# Altium PCB AudioDSP-2.0.PcbDoc (part 2 of 2)
Units mil, origin at the board's own origin, x right, y up, seen from the top; angles counter-clockwise.
Board outline 3935 x 3935 mil, 4 copper layers (Top Layer, MLT, MLB, Bottom Layer), stack 59.617 mil thick; 223 components, 140 nets, 777 pads, 366 vias.
Unrouted connection lines stored in the file: 450.
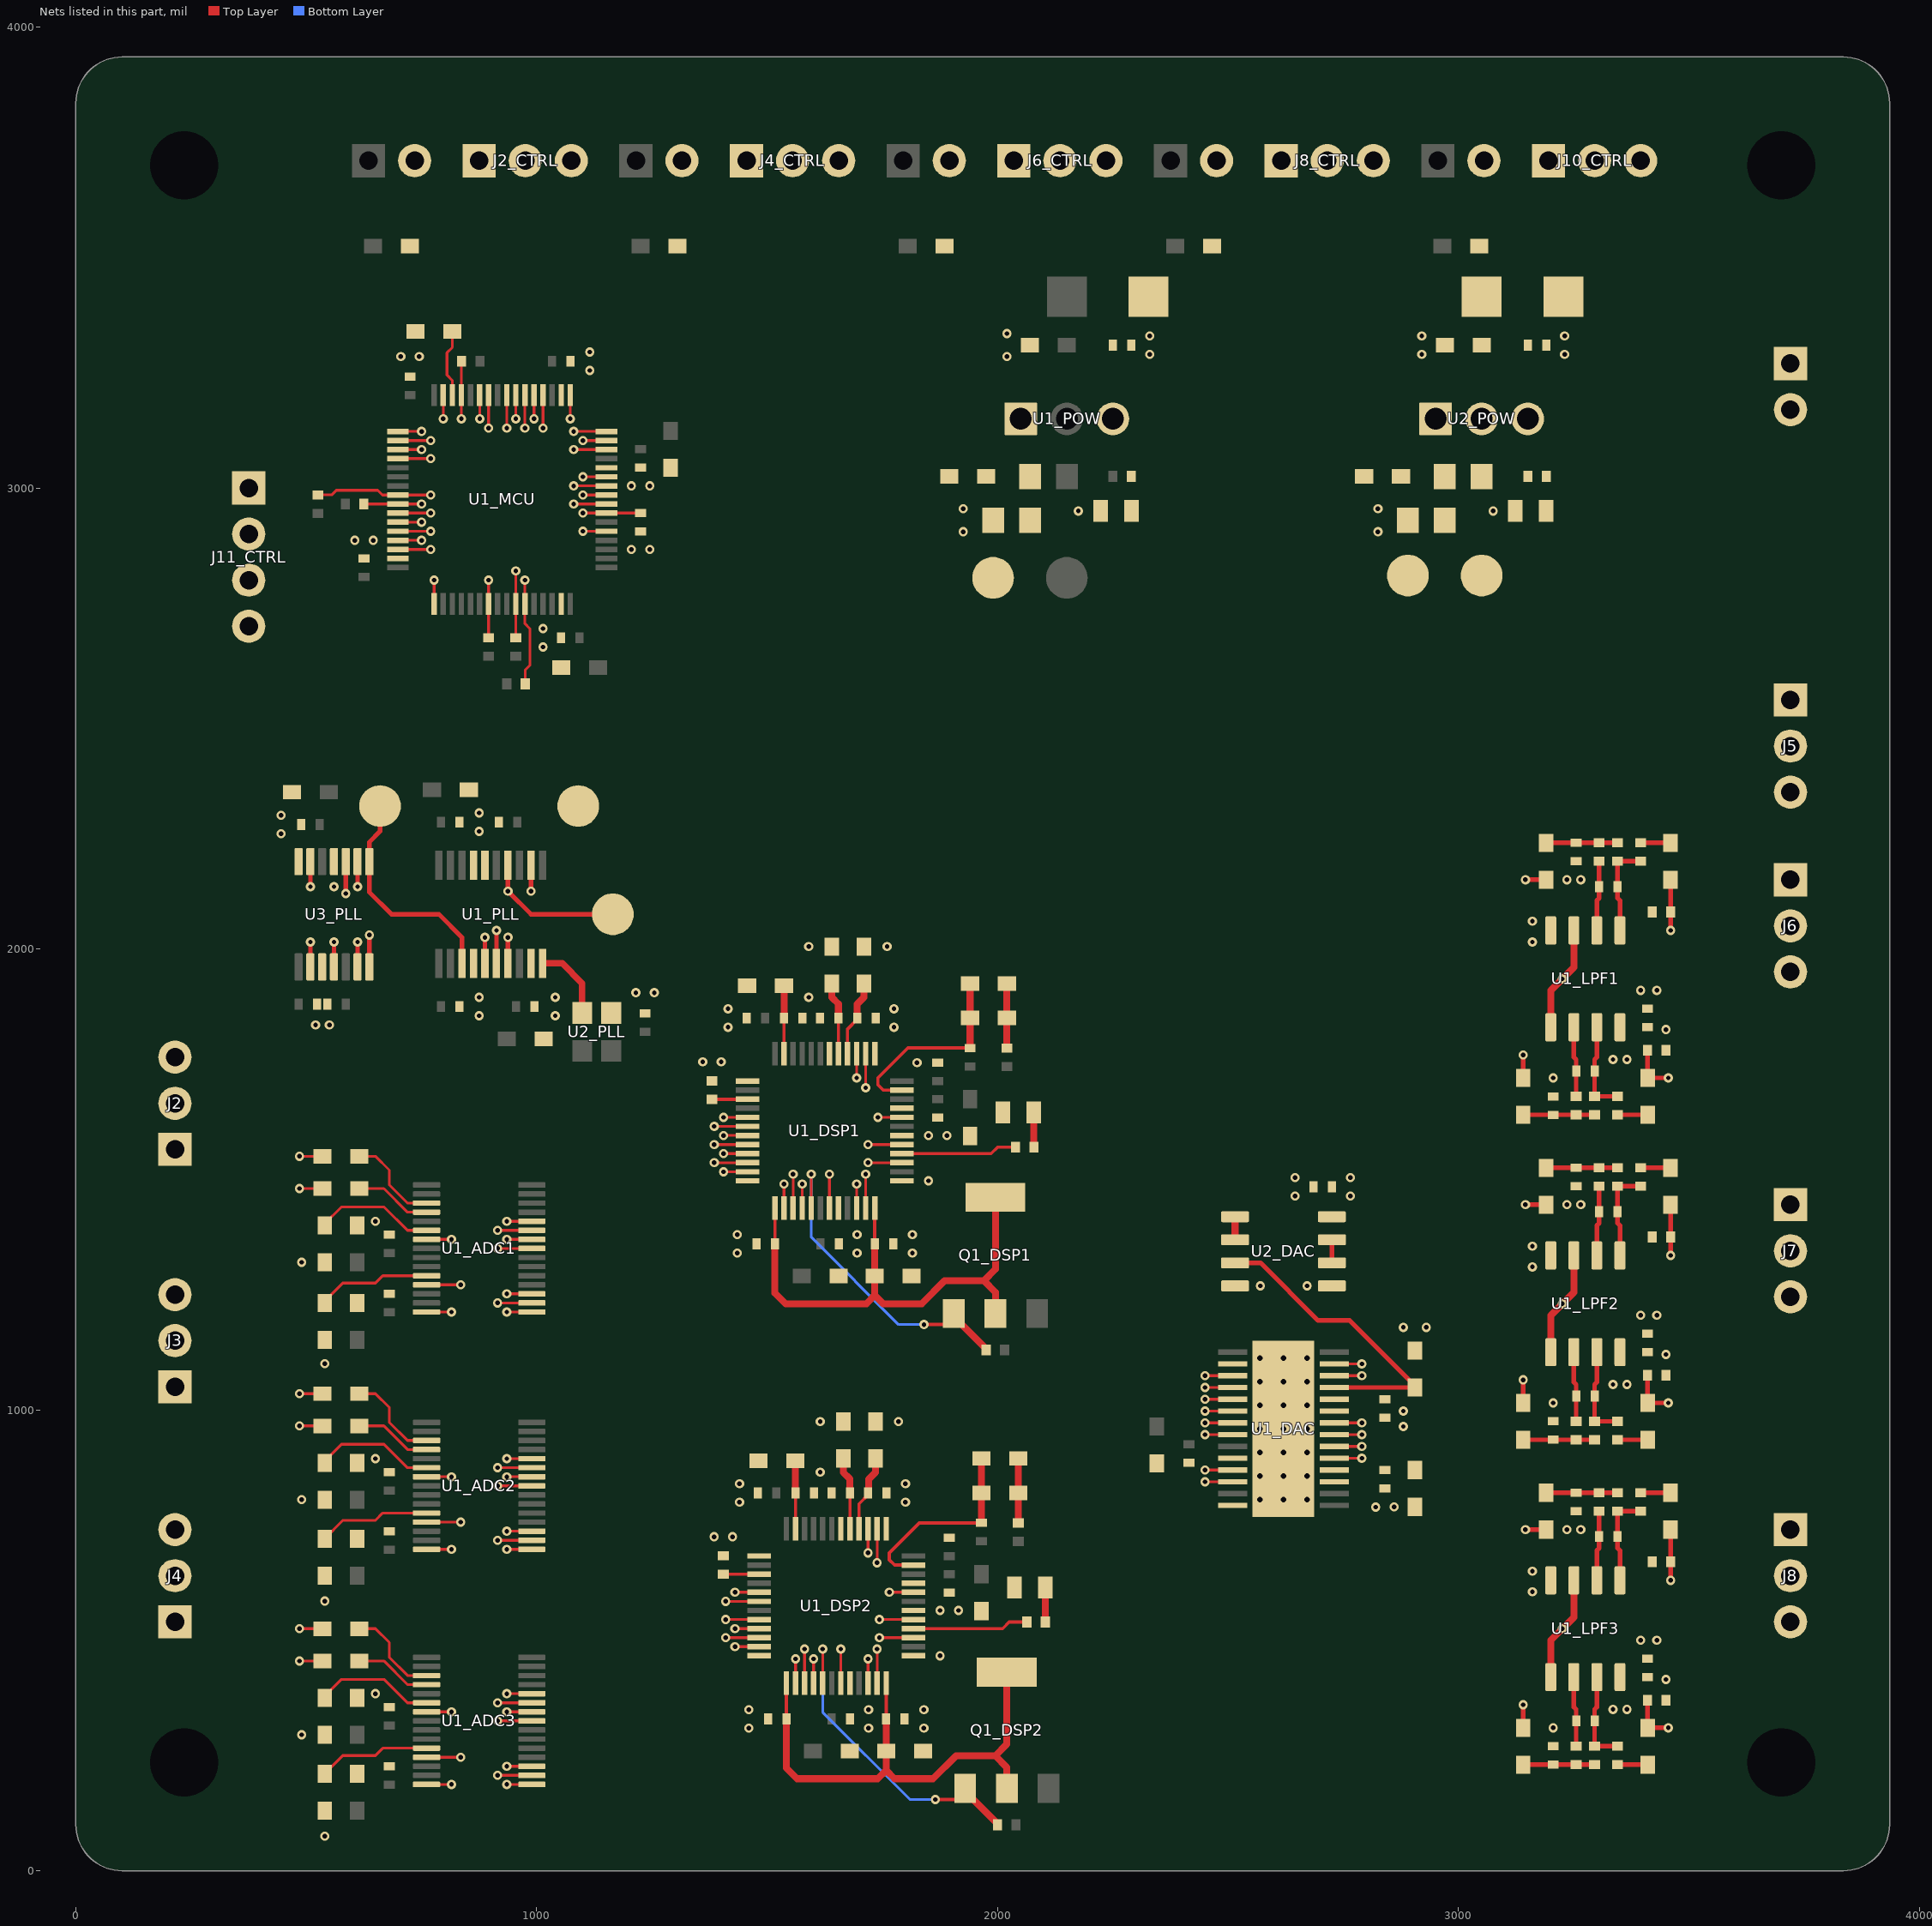
[diagram p2: the nets of this part, all layers, seen from the top]

## Via types
v1: diameter 20, hole 10, Top Layer to Bottom Layer, tented both sides, 345 vias
v2: diameter 23.62, hole 11.81, Top Layer to Bottom Layer, tented both sides, 21 vias

## Nets (pads, with @x,y where several pads share a name; then routed paths per layer and width w, separated by ;. In a path a pad name is that pad's centre, name@x,y a point inside that pad or via, vN(x,y) a via of type N, cw(c..) or ccw(c..) an arc to the next point about the centre after c; other vN are vias at no path point) (continued)
+5V0: C1_POW.2 C3_DAC.2 C4_DAC.2 C4_POW.2 C5_DAC.2 C7_DAC.1 C9_LPF1.1 C9_LPF2.1 C9_LPF3.1 D1_POW.2 D2_POW.1 R3_POW.2 R6_POW.1 TP1_POW.1 U1_DAC.17 U1_DAC.23 U1_LPF1.8 U1_LPF2.8 U1_LPF3.8 U1_POW.3 U2_DAC.8 U2_POW.2
  other v1: 3335,350 3365,350 2820,788.82 2860,789.25 2880,963.82 2880,997.2 3335,1055 3365,1055 2765,1463.82 2765,1503.82 3335,1760 3365,1760
+DC_IN: C3_POW.2 D2_POW.2 J1.1 U2_POW.3
ADC0: J2_CTRL.3 U1_MCU.14 | length 71.4
  Top Layer w6: v1(1080,3083.27) U1_MCU.14@1151.38,3083.27
ADC1: J2_CTRL.2 U1_MCU.15 | length 51.4
  Top Layer w6: v1(1100,3102.95) U1_MCU.15@1151.38,3102.95
ADC2: J2_CTRL.1 U1_MCU.16 | length 71.4
  Top Layer w6: v1(1080,3122.64) U1_MCU.16@1151.38,3122.64
ADC3: J4_CTRL.3 U1_MCU.17 | length 51.4
  Top Layer w6: v1(1072.64,3150) U1_MCU.17@1072.64,3201.38
ADC4: J4_CTRL.2 U1_MCU.20 | length 71.4
  Top Layer w6: v1(1013.58,3130) U1_MCU.20@1013.58,3201.38
ADC5: J4_CTRL.1 U1_MCU.21 | length 51.4
  Top Layer w6: v1(993.9,3150) U1_MCU.21@993.9,3201.38
ADC6: J6_CTRL.3 U1_MCU.22 | length 71.4
  Top Layer w6: v1(974.21,3130) U1_MCU.22@974.21,3201.38
ADC7: J6_CTRL.2 U1_MCU.23 | length 51.4
  Top Layer w6: v1(954.53,3150) U1_MCU.23@954.53,3201.38
ADC8: J6_CTRL.1 U1_MCU.26 | length 71.4
  Top Layer w6: v1(895.47,3130) U1_MCU.26@895.47,3201.38
ADC9: J8_CTRL.3 U1_MCU.27 | length 51.6
  Top Layer w6: U1_MCU.27@875.79,3201.38 876.1,3201.06 876.1,3150.31 v1(876.42,3150)
ADC10: J8_CTRL.2 U1_MCU.8 | length 71.4
  Top Layer w6: v1(1080,2965.16) U1_MCU.8@1151.38,2965.16
ADC11: J8_CTRL.1 U1_MCU.9 | length 51.4
  Top Layer w6: v1(1100,2984.84) U1_MCU.9@1151.38,2984.84
ADC12: J10_CTRL.3 U1_MCU.10 | length 71.4
  Top Layer w6: v1(1080,3004.53) U1_MCU.10@1151.38,3004.53
ADC13: J10_CTRL.2 U1_MCU.11 | length 51.4
  Top Layer w6: v1(1100,3024.21) U1_MCU.11@1151.38,3024.21
ADC14: J10_CTRL.1 U1_MCU.24 | length 71.4
  Top Layer w6: v1(934.84,3130) U1_MCU.24@934.84,3201.38
CSEL: U1_MCU.45 U1_PLL.12 | length 107.9
  Top Layer w6: U1_MCU.45@698.62,2886.42 v1(750,2886.42)
  Top Layer w10: v1(987.48,2125) U1_PLL.12@987.48,2181.5
EN_SCK: U1_MCU.36 U3_PLL.2 | length 125.6
  Top Layer w6: U1_MCU.36@698.62,3063.58 v1(770,3063.58)
  Top Layer w10: v1(611.18,2135) U3_PLL.2@611.18,2189.17
FS1: U1_MCU.42 U1_PLL.5 | length 127.9
  Top Layer w6: U1_MCU.42@698.62,2945.47 v1(770,2945.47)
  Top Layer w10: U1_PLL.5@887.5,1968.5 v1(887.5,2025)
FS2: U1_MCU.43 U1_PLL.6 | length 122.9
  Top Layer w6: U1_MCU.43@698.62,2925.79 v1(750,2925.79)
  Top Layer w10: U1_PLL.6@912.5,1968.5 v1(912.5,2040)
GND: C1_ADC1.1 C1_ADC2.1 C1_ADC3.1 C1_CTRL.1 C1_DAC.1 C1_DSP1.2 C1_DSP2.2 C1_MCU.1 C1_PLL.1 C1_POW.1 C2_ADC1.1 C2_ADC2.1 C2_ADC3.1 C2_CTRL.1 C2_DAC.1 C2_DSP1.2 C2_DSP2.2 C2_LPF1.1 C2_LPF2.1 C2_LPF3.1 C2_MCU.1 C2_PLL.1 C2_POW.1 C3_ADC1.1 C3_ADC2.1 C3_ADC3.1 C3_CTRL.1 C3_DAC.1 C3_DSP1.2 C3_DSP2.2 C3_MCU.1 C3_PLL.1 C3_POW.1 C4_CTRL.1 C4_DAC.1 C4_DSP1.2 C4_DSP2.2 C4_MCU.1 C4_PLL.1 C4_POW.1 C5_ADC1.1 C5_ADC2.1 C5_ADC3.1 C5_CTRL.1 C5_DAC.1 C5_DSP1.2 C5_DSP2.2 C5_MCU.1 C5_PLL.1 C5_POW.1 C6_DAC.1 C6_DSP1.2 C6_DSP2.2 C6_LPF1.1 C6_LPF2.1 C6_LPF3.1 C6_MCU.1 C6_PLL.1 C6_POW.1 C7_ADC1.2 C7_ADC2.2 C7_ADC3.2 C7_DAC.2 C7_DSP1.1 C7_DSP2.1 C7_MCU.1 C7_PLL.1 C8_DSP1.1 C8_DSP2.1 C8_MCU.1 C8_PLL.1 C9_DSP1.1 C9_DSP2.1 C9_LPF1.2 C9_LPF2.2 C9_LPF3.2 C9_MCU.1 C9_PLL.1 C10_ADC1.1 C10_ADC2.1 C10_ADC3.1 C10_DSP1.2 C10_DSP2.2 C10_PLL.1 C11_DSP1.2 C11_DSP2.2 C11_PLL.1 C12_DSP1.1 C12_DSP2.1 C13_DSP1.1 C13_DSP2.1 C14_DSP1.1 C14_DSP2.1 C15_DSP1.1 C15_DSP2.1 D1_DSP1.2 D1_DSP2.2 D3_POW.2 D4_POW.2 J1.2 J1_CTRL.2 J2.3 J3.3 J3_CTRL.2 J4.3 J5.3 J5_CTRL.2 J6.3 J7.3 J7_CTRL.2 J8.3 J9_CTRL.2 J11_CTRL.3 R2_POW.1 R4_DSP1.1 R4_DSP2.1 R4_POW.1 R5_LPF1.1 R5_LPF2.1 R5_LPF3.1 R10_LPF1.1 R10_LPF2.1 R10_LPF3.1 TP3_PLL.1 TP3_POW.1 TP4_POW.1 U1_ADC1.7 U1_ADC1.12 U1_ADC1.25 U1_ADC1.26 U1_ADC2.7 U1_ADC2.12 U1_ADC2.25 U1_ADC2.26 U1_ADC3.7 U1_ADC3.12 U1_ADC3.25 U1_ADC3.26 U1_DAC.2 U1_DAC.10 U1_DAC.14 U1_DAC.18 U1_DAC.24 U1_DAC.29 U1_DSP1.1 U1_DSP1.6 U1_DSP1.7 U1_DSP1.12 U1_DSP1.20 U1_DSP1.25 U1_DSP1.30 U1_DSP1.33 U1_DSP1.37 U1_DSP1.42 U1_DSP2.1 U1_DSP2.6 U1_DSP2.12 U1_DSP2.20 U1_DSP2.25 U1_DSP2.30 U1_DSP2.33 U1_DSP2.37 U1_DSP2.42 U1_LPF1.4 U1_LPF2.4 U1_LPF3.4 U1_MCU.12 U1_MCU.18 U1_MCU.31 U1_MCU.47 U1_MCU.63 U1_PLL.4 U1_PLL.9 U1_PLL.16 U1_PLL.17 U2_DAC.4 U2_DAC.5 U2_PLL.2 U3_PLL.4 U3_PLL.7 U3_PLL.10 | length 1019.3
  Top Layer w6: U1_ADC3.12@760.83,246.26 v1(835,246.26) ; U1_ADC3.7@760.83,344.69 v1(815,344.69) ; U1_ADC2.12@760.83,756.26 v1(835,756.26) ; U1_ADC2.7@760.83,854.69 v1(815,854.69) ; U1_ADC1.12@760.83,1271.26 v1(835,1271.26) ; U1_ADC1.7@760.83,1369.69 v1(815,1369.69) ; v1(797.05,3150) U1_MCU.31@797.05,3201.38 ; v1(915,364.37) U1_ADC3.25@989.17,364.37 ; v1(915,874.37) U1_ADC2.25@989.17,874.37 ; v1(915,1389.37) U1_ADC1.25@989.17,1389.37 ; v1(935,384.06) U1_ADC3.26@989.17,384.06 ; v1(935,894.06) U1_ADC2.26@989.17,894.06 ; v1(935,1409.06) U1_ADC1.26@989.17,1409.06 ; v1(1385,1614.84) U1_DSP1.6@1457.68,1614.84 ; v1(1405,1595.16) U1_DSP1.7@1457.68,1595.16 ; v1(1410,584.37) U1_DSP2.6@1482.52,584.37
  other v1: 540,75 490,295 1459.84,309.53 1719.84,309.53 1839.84,309.53 3205,310 1459.84,349.53 1719.84,349.53 1839.84,349.53 650,384.06 3450,415 1874.84,466.26 3395,500 3430,500 1874.84,564.69 1914.84,564.69 540,585 3160,605 3160,650 1384.84,724.53 1424.84,724.53 3235,740 3265,740 1439.84,799.53 1799.84,799.53 490,805 1439.84,839.53 1799.84,839.53 1614.84,864.53 650,894.06 1614.84,974.53 1784.84,974.53 3205,1015 540,1100 3450,1120 2880,1178.82 2930,1178.82 3395,1205 3430,1205 2570,1268.82 2671.18,1268.82 3160,1310 490,1320 1435,1340 1695,1340 1815,1340 3160,1355 1435,1380 1695,1380 1815,1380 650,1409.06 3235,1445 3265,1445 2645,1463.82 1850,1496.73 2645,1503.82 1850,1595.16 1890,1595.16 3205,1720 1825,1753.27 1360,1755 1400,1755 3450,1825 1415,1830 1775,1830 520,1835 550,1835 875,1855 1040,1855 1415,1870 1775,1870 875,1895 1040,1895 1590,1895 1215,1905 1255,1905 3395,1910 3430,1910 1590,2005 1760,2005 3160,2015 3160,2060 560,2135 3235,2150 3265,2150 445,2250 875,2255 445,2290 875,2295 1013.58,2655 1013.58,2695 1205,2866.73 1245,2866.73 605,2886.42 645,2886.42 1925,2905 2825,2905 2175,2950 3075,2950 1925,2955 2825,2955 1205,3004.53 1245,3004.53 1115,3255 705,3285 745,3285 2020,3285 2330,3290 2920,3290 3230,3290 1115,3295 2330,3330 2920,3330 3230,3330 2020,3335
  other v2: 2568.82,805.28 2620,805.28 2671.18,805.28 2568.82,856.46 2620,856.46 2671.18,856.46 2568.82,907.64 2620,907.64 2671.18,907.64 2568.82,958.82 2620,958.82 2671.18,958.82 2568.82,1010 2620,1010 2671.18,1010 2568.82,1061.18 2620,1061.18 2671.18,1061.18 2568.82,1112.36 2620,1112.36 2671.18,1112.36
I2C1.SCL: R1_MCU.1 U1_ADC1.24 U1_DSP1.23 U1_DSP2.23 U1_MCU.58 | length 346.7
  Top Layer w6: v1(935,1369.68) U1_ADC1.24@989.17,1369.68 ; R1_MCU.1@954.53,2675 U1_MCU.58@954.53,2748.62 v1(954.53,2820) ; U1_DSP1.23@1713.58,1437.68 v1(1713.58,1511.42) ; U1_DSP2.23@1738.43,407.2 v1(1738.43,480.94)
I2C1.SDA: R2_MCU.1 U1_ADC1.23 U1_DSP1.22 U1_DSP2.22 U1_MCU.59 | length 412.4
  Top Layer w6: v1(915,1350) U1_ADC1.23@989.17,1350 ; v1(974.21,2800) U1_MCU.59@974.21,2748.62 974.21,2705.79 985,2695 985,2615 975,2605 R2_MCU.1@975,2575 ; U1_DSP1.22@1693.9,1437.68 v1(1693.9,1490) ; U1_DSP2.22@1718.74,407.2 v1(1718.74,459.53)
I2C2.SCL: R3_MCU.1 U1_ADC2.24 U1_MCU.29 | length 179.2
  Top Layer w6: v1(836.42,3150) U1_MCU.29@836.42,3201.38 R3_MCU.1@836.42,3275 ; v1(935,854.68) U1_ADC2.24@989.17,854.68
I2C2.SDA: R4_MCU.1 U1_ADC2.23 U1_MCU.55 | length 199.2
  Top Layer w6: R4_MCU.1@895.47,2675 U1_MCU.55@895.47,2748.62 v1(895.47,2800) ; v1(915,835) U1_ADC2.23@989.17,835
I2C3.SCL: R5_MCU.1 U1_ADC3.24 U1_DAC.3 U1_MCU.41 | length 238.9
  Top Layer w6: R5_MCU.1@625,2965.16 U1_MCU.41@698.62,2965.16 v1(750,2965.16) ; v1(935,344.68) U1_ADC3.24@989.17,344.68 ; v1(2450,1073.98) U1_DAC.3@2509.76,1073.98
I2C3.SDA: R6_MCU.1 U1_ADC3.23 U1_DAC.4 U1_MCU.40 | length 387.3
  Top Layer w6: R6_MCU.1@525,2985 555,2985 565,2995 655,2995 665.16,2984.84 U1_MCU.40@698.62,2984.84 v1(770,2984.84) ; v1(915,325) U1_ADC3.23@989.17,325 ; v1(2450,1048.39) U1_DAC.4@2509.76,1048.39
LED_ON_DSP1: R3_DSP1.1 U1_DSP1.28 | length 252
  Top Layer w7: U1_DSP1.28@1792.32,1555.79 1985.79,1555.79 2000,1570 R3_DSP1.1@2038.46,1570
LED_ON_DSP2: R3_DSP2.1 U1_DSP2.28 | length 252
  Top Layer w7: U1_DSP2.28@1817.17,525.32 2010.63,525.32 2024.84,539.53 R3_DSP2.1@2063.31,539.53
MCK: TP1_PLL.1 U1_MCU.5 U1_PLL.14 | length 356.1
  Top Layer w6: v1(1100,2906.1) U1_MCU.5@1151.38,2906.1
  Top Layer w10: U1_PLL.14@937.5,2181.5 v1(937.5,2125) 987.5,2075 TP1_PLL.1@1165,2075
NetC1_LPF1_1: C1_LPF1.1 R3_LPF1.1 U1_LPF1.2 | length 152.1
  Top Layer w10: U1_LPF1.2@3300,2040 3300,2105 3305,2110 C1_LPF1.1@3305,2135 R3_LPF1.1@3305,2190
NetC1_LPF1_2: C1_LPF1.2 R2_LPF1.2 R4_LPF1.2 U1_LPF1.1 | length 202.1
  Top Layer w10: U1_LPF1.1@3350,2040 3350,2105 3345,2110 C1_LPF1.2@3345,2135 R2_LPF1.2@3345,2190 R4_LPF1.2@3395,2190
NetC1_LPF2_1: C1_LPF2.1 R3_LPF2.1 U1_LPF2.2 | length 152.1
  Top Layer w10: U1_LPF2.2@3300,1335 3300,1400 3305,1405 C1_LPF2.1@3305,1430 R3_LPF2.1@3305,1485
NetC1_LPF2_2: C1_LPF2.2 R2_LPF2.2 R4_LPF2.2 U1_LPF2.1 | length 202.1
  Top Layer w10: U1_LPF2.1@3350,1335 3350,1400 3345,1405 C1_LPF2.2@3345,1430 R2_LPF2.2@3345,1485 R4_LPF2.2@3395,1485
NetC1_LPF3_1: C1_LPF3.1 R3_LPF3.1 U1_LPF3.2 | length 152.1
  Top Layer w10: U1_LPF3.2@3300,630 3300,695 3305,700 C1_LPF3.1@3305,725 R3_LPF3.1@3305,780
NetC1_LPF3_2: C1_LPF3.2 R2_LPF3.2 R4_LPF3.2 U1_LPF3.1 | length 202.1
  Top Layer w10: U1_LPF3.1@3350,630 3350,695 3345,700 C1_LPF3.2@3345,725 R2_LPF3.2@3345,780 R4_LPF3.2@3395,780
NetC2_LPF1_2: C2_LPF1.2 R1_LPF1.1 R2_LPF1.1 R3_LPF1.2 | length 155
  Top Layer w10: R1_LPF1.1@3190,2230 C2_LPF1.2@3255,2230 R3_LPF1.2@3305,2230 R2_LPF1.1@3345,2230
NetC2_LPF2_2: C2_LPF2.2 R1_LPF2.1 R2_LPF2.1 R3_LPF2.2 | length 155
  Top Layer w10: R1_LPF2.1@3190,1525 C2_LPF2.2@3255,1525 R3_LPF2.2@3305,1525 R2_LPF2.1@3345,1525
NetC2_LPF3_2: C2_LPF3.2 R1_LPF3.1 R2_LPF3.1 R3_LPF3.2 | length 155
  Top Layer w10: R1_LPF3.1@3190,820 C2_LPF3.2@3255,820 R3_LPF3.2@3305,820 R2_LPF3.1@3345,820
NetC4_LPF1_2: C4_LPF1.2 R4_LPF1.1 | length 65
  Top Layer w10: R4_LPF1.1@3395,2230 C4_LPF1.2@3460,2230
NetC4_LPF2_2: C4_LPF2.2 R4_LPF2.1 | length 65
  Top Layer w10: R4_LPF2.1@3395,1525 C4_LPF2.2@3460,1525
NetC4_LPF3_2: C4_LPF3.2 R4_LPF3.1 | length 65
  Top Layer w10: R4_LPF3.1@3395,820 C4_LPF3.2@3460,820
NetC5_LPF1_1: C5_LPF1.1 R8_LPF1.1 U1_LPF1.6 | length 152.1
  Top Layer w10: U1_LPF1.6@3250,1830 3250,1765 3255,1760 C5_LPF1.1@3255,1735 R8_LPF1.1@3255,1680
NetC5_LPF1_2: C5_LPF1.2 R7_LPF1.2 R9_LPF1.2 U1_LPF1.7 | length 202.1
  Top Layer w10: U1_LPF1.7@3300,1830 3300,1765 3295,1760 C5_LPF1.2@3295,1735 R7_LPF1.2@3295,1680 R9_LPF1.2@3345,1680
NetC5_LPF2_1: C5_LPF2.1 R8_LPF2.1 U1_LPF2.6 | length 152.1
  Top Layer w10: U1_LPF2.6@3250,1125 3250,1060 3255,1055 C5_LPF2.1@3255,1030 R8_LPF2.1@3255,975
NetC5_LPF2_2: C5_LPF2.2 R7_LPF2.2 R9_LPF2.2 U1_LPF2.7 | length 202.1
  Top Layer w10: U1_LPF2.7@3300,1125 3300,1060 3295,1055 C5_LPF2.2@3295,1030 R7_LPF2.2@3295,975 R9_LPF2.2@3345,975
NetC5_LPF3_1: C5_LPF3.1 R8_LPF3.1 U1_LPF3.6 | length 152.1
  Top Layer w10: U1_LPF3.6@3250,420 3250,355 3255,350 C5_LPF3.1@3255,325 R8_LPF3.1@3255,270
NetC5_LPF3_2: C5_LPF3.2 R7_LPF3.2 R9_LPF3.2 U1_LPF3.7 | length 202.1
  Top Layer w10: U1_LPF3.7@3300,420 3300,355 3295,350 C5_LPF3.2@3295,325 R7_LPF3.2@3295,270 R9_LPF3.2@3345,270
NetC5_POW_2: C5_POW.2 R3_POW.1 R4_POW.2 U2_POW.1
NetC6_LPF1_2: C6_LPF1.2 R6_LPF1.1 R7_LPF1.1 R8_LPF1.2 | length 155
  Top Layer w10: R6_LPF1.1@3140,1640 C6_LPF1.2@3205,1640 R8_LPF1.2@3255,1640 R7_LPF1.1@3295,1640
NetC6_LPF2_2: C6_LPF2.2 R6_LPF2.1 R7_LPF2.1 R8_LPF2.2 | length 155
  Top Layer w10: R6_LPF2.1@3140,935 C6_LPF2.2@3205,935 R8_LPF2.2@3255,935 R7_LPF2.1@3295,935
NetC6_LPF3_2: C6_LPF3.2 R6_LPF3.1 R7_LPF3.1 R8_LPF3.2 | length 155
  Top Layer w10: R6_LPF3.1@3140,230 C6_LPF3.2@3205,230 R8_LPF3.2@3255,230 R7_LPF3.1@3295,230
NetC6_POW_2: C6_POW.2 R1_POW.1 R2_POW.2 U1_POW.1
NetC7_ADC1_1: C7_ADC1.1 U1_ADC1.11 | length 247.6
  Top Layer w6: C7_ADC1.1@540,1231.89 540,1235.83 579.17,1275 650,1275 665.94,1290.94 U1_ADC1.11@760.83,1290.94
NetC7_ADC2_1: C7_ADC2.1 U1_ADC2.11 | length 247.6
  Top Layer w6: C7_ADC2.1@540,716.89 540,720.83 579.17,760 650,760 665.94,775.94 U1_ADC2.11@760.83,775.94
NetC7_ADC3_1: C7_ADC3.1 U1_ADC3.11 | length 247.6
  Top Layer w6: C7_ADC3.1@540,206.89 540,210.83 579.17,250 650,250 665.94,265.94 U1_ADC3.11@760.83,265.94
NetC7_DSP1_2: C7_DSP1.2 C8_DSP1.2 C9_DSP1.2 Q1_DSP1.C Q1_DSP1.C-TAB U1_DSP1.13 U1_DSP1.24 | length 1145.2
  Top Layer w7: C8_DSP1.2@1516.73,1360 U1_DSP1.13@1516.73,1437.68 ; C9_DSP1.2@1733.27,1360 U1_DSP1.24@1733.27,1437.68
  Top Layer w15: C8_DSP1.2@1516.73,1360 1516.73,1253.27 1540,1230 1715,1230 1733.27,1248.27 ; C9_DSP1.2@1733.27,1360 C7_DSP1.2@1733.27,1290 1733.27,1248.27 ; Q1_DSP1.C@1995,1209.02 1995,1255 1970,1280 ; Q1_DSP1.C-TAB@1995,1460.98 1995,1305 1970,1280 ; 1733.27,1248.27 1751.54,1230 1835,1230 1885,1280 1970,1280
NetC7_DSP2_2: C7_DSP2.2 C8_DSP2.2 C9_DSP2.2 Q1_DSP2.C Q1_DSP2.C-TAB U1_DSP2.13 U1_DSP2.24 | length 1145.2
  Top Layer w7: C8_DSP2.2@1541.57,329.53 U1_DSP2.13@1541.57,407.2 ; C9_DSP2.2@1758.11,329.53 U1_DSP2.24@1758.11,407.2
  Top Layer w15: C8_DSP2.2@1541.57,329.53 1541.57,222.8 1564.84,199.53 1739.84,199.53 1758.11,217.8 ; C9_DSP2.2@1758.11,329.53 C7_DSP2.2@1758.11,259.53 1758.11,217.8 ; Q1_DSP2.C@2019.84,178.54 2019.84,224.53 1994.84,249.53 ; Q1_DSP2.C-TAB@2019.84,430.51 2019.84,274.53 1994.84,249.53 ; 1758.11,217.8 1776.38,199.53 1859.84,199.53 1909.84,249.53 1994.84,249.53
NetC8_ADC1_1: C8_ADC1.1 U1_ADC1.3 | length 206.8
  Top Layer w6: C8_ADC1.1@615,1550 650,1550 680,1520 680,1487.8 719.37,1448.43 U1_ADC1.3@760.83,1448.43
NetC8_ADC2_1: C8_ADC2.1 U1_ADC2.3 | length 206.8
  Top Layer w6: C8_ADC2.1@615,1035 650,1035 680,1005 680,972.8 719.37,933.43 U1_ADC2.3@760.83,933.43
NetC8_ADC3_1: C8_ADC3.1 U1_ADC3.3 | length 206.8
  Top Layer w6: C8_ADC3.1@615,525 650,525 680,495 680,462.8 719.37,423.43 U1_ADC3.3@760.83,423.43
NetC8_LPF1_2: C8_LPF1.2 R9_LPF1.1 | length 65
  Top Layer w10: R9_LPF1.1@3345,1640 C8_LPF1.2@3410,1640
NetC8_LPF2_2: C8_LPF2.2 R9_LPF2.1 | length 65
  Top Layer w10: R9_LPF2.1@3345,935 C8_LPF2.2@3410,935
NetC8_LPF3_2: C8_LPF3.2 R9_LPF3.1 | length 65
  Top Layer w10: R9_LPF3.1@3345,230 C8_LPF3.2@3410,230
NetC8_MCU_2: C8_MCU.2 U1_MCU.30 | length 148.3
  Top Layer w6: U1_MCU.30@816.73,3201.38 816.73,3233.27 805,3245 805,3293.27 816.73,3305 C8_MCU.2@816.73,3340
NetC9_ADC1_1: C9_ADC1.1 U1_ADC1.4 | length 167.1
  Top Layer w6: C9_ADC1.1@615,1480 668.11,1480 719.37,1428.74 U1_ADC1.4@760.83,1428.74
NetC9_ADC2_1: C9_ADC2.1 U1_ADC2.4 | length 167.1
  Top Layer w6: C9_ADC2.1@615,965 668.11,965 719.37,913.74 U1_ADC2.4@760.83,913.74
NetC9_ADC3_1: C9_ADC3.1 U1_ADC3.4 | length 167.1
  Top Layer w6: C9_ADC3.1@615,455 668.11,455 719.37,403.74 U1_ADC3.4@760.83,403.74
NetC10_ADC1_2: C10_ADC1.2 U1_ADC1.6 | length 260.7
  Top Layer w6: C10_ADC1.2@540,1400 540,1403.94 576.06,1440 668.74,1440 719.37,1389.37 U1_ADC1.6@760.83,1389.37
NetC10_ADC2_2: C10_ADC2.2 U1_ADC2.6 | length 260.7
  Top Layer w6: C10_ADC2.2@540,885 540,888.94 576.06,925 668.74,925 719.37,874.37 U1_ADC2.6@760.83,874.37
NetC10_ADC3_2: C10_ADC3.2 U1_ADC3.6 | length 260.7
  Top Layer w6: C10_ADC3.2@540,375 540,378.94 576.06,415 668.74,415 719.37,364.37 U1_ADC3.6@760.83,364.37
NetC10_DSP1_1: C10_DSP1.1 C11_DSP1.1 U1_DSP1.47 | length 147.7
  Top Layer w7: U1_DSP1.47@1536.42,1772.32 C11_DSP1.1@1536.42,1850
  Top Layer w15: C11_DSP1.1@1536.42,1850 C10_DSP1.1@1536.42,1920
NetC10_DSP2_1: C10_DSP2.1 C11_DSP2.1 U1_DSP2.47 | length 147.7
  Top Layer w7: U1_DSP2.47@1561.26,741.85 C11_DSP2.1@1561.26,819.53
  Top Layer w15: C11_DSP2.1@1561.26,819.53 C10_DSP2.1@1561.26,889.53
NetC12_DSP1_2: C12_DSP1.2 C13_DSP1.2 U1_DSP1.41 | length 158.7
  Top Layer w7: U1_DSP1.41@1654.53,1772.32 C13_DSP1.2@1654.53,1850
  Top Layer w15: C12_DSP1.2@1640,1925 1640,1895 1654.53,1880.47 C13_DSP1.2@1654.53,1850
NetC12_DSP2_2: C12_DSP2.2 C13_DSP2.2 U1_DSP2.41 | length 158.7
  Top Layer w7: U1_DSP2.41@1679.37,741.85 C13_DSP2.2@1679.37,819.53
  Top Layer w15: C12_DSP2.2@1664.84,894.53 1664.84,864.53 1679.37,850 C13_DSP2.2@1679.37,819.53
NetC14_DSP1_2: C14_DSP1.2 C15_DSP1.2 U1_DSP1.40 | length 167.5
  Top Layer w7: U1_DSP1.40@1674.21,1772.32 1674.21,1826.26 C15_DSP1.2@1695,1847.05
  Top Layer w15: C15_DSP1.2@1695,1847.05 C15_DSP1.2@1695,1850 1695,1880 1710,1895 C14_DSP1.2@1710,1925
NetC14_DSP2_2: C14_DSP2.2 C15_DSP2.2 U1_DSP2.40 | length 167.5
  Top Layer w7: U1_DSP2.40@1699.06,741.85 1699.06,795.79 C15_DSP2.2@1719.84,816.57
  Top Layer w15: C15_DSP2.2@1719.84,816.57 1719.84,819.53 1719.84,849.53 1734.84,864.53 C14_DSP2.2@1734.84,894.53
NetC16_DSP1_2: C16_DSP1.2 C17_DSP1.2 C18_DSP1.2 U1_DSP1.35 | length 439
  Top Layer w7: U1_DSP1.35@1792.32,1693.58 1751.42,1693.58 1740,1705 1740,1720 1805,1785 C16_DSP1.2@1940,1785
  Top Layer w15: C16_DSP1.2@1940,1785 C18_DSP1.2@1940,1850 C17_DSP1.2@1940,1925
NetC16_DSP2_2: C16_DSP2.2 C17_DSP2.2 C18_DSP2.2 U1_DSP2.35 | length 439
  Top Layer w7: U1_DSP2.35@1817.17,663.11 1776.26,663.11 1764.84,674.53 1764.84,689.53 1829.84,754.53 C16_DSP2.2@1964.84,754.53
  Top Layer w15: C16_DSP2.2@1964.84,754.53 C18_DSP2.2@1964.84,819.53 C17_DSP2.2@1964.84,894.53
NetC17_DSP1_1: C17_DSP1.1 C18_DSP1.1 R2_DSP1.2 | length 140
  Top Layer w15: R2_DSP1.2@2020,1785 C18_DSP1.1@2020,1850 C17_DSP1.1@2020,1925
NetC17_DSP2_1: C17_DSP2.1 C18_DSP2.1 R2_DSP2.2 | length 140
  Top Layer w15: R2_DSP2.2@2044.84,754.53 C18_DSP2.1@2044.84,819.53 C17_DSP2.1@2044.84,894.53
NetD1_DSP1_1: D1_DSP1.1 R3_DSP1.2 | length 75
  Top Layer w15: R3_DSP1.2@2078.46,1570 D1_DSP1.1@2078.46,1645
NetD1_DSP2_1: D1_DSP2.1 R3_DSP2.2 | length 75
  Top Layer w15: R3_DSP2.2@2103.31,539.53 D1_DSP2.1@2103.31,614.53
NetD3_POW_1: D3_POW.1 R5_POW.2
NetD4_POW_1: D4_POW.1 R6_POW.2
NetJ2_1: C8_ADC1.2 J2.1 | length 50
  Top Layer w6: v1(485,1550) C8_ADC1.2@535,1550
NetJ2_2: C9_ADC1.2 J2.2 | length 50
  Top Layer w6: v1(485,1480) C9_ADC1.2@535,1480
NetJ3_1: C8_ADC2.2 J3.1 | length 50
  Top Layer w6: v1(485,1035) C8_ADC2.2@535,1035
NetJ3_2: C9_ADC2.2 J3.2 | length 50
  Top Layer w6: v1(485,965) C9_ADC2.2@535,965
NetJ4_1: C8_ADC3.2 J4.1 | length 50
  Top Layer w6: v1(485,525) C8_ADC3.2@535,525
NetJ4_2: C9_ADC3.2 J4.2 | length 50
  Top Layer w6: v1(485,455) C9_ADC3.2@535,455
NetJ5_1: C4_LPF1.1 J5.1 J6.1 R5_LPF1.2 | length 110
  Top Layer w10: v1(3460,2040) R5_LPF1.2@3460,2080 C4_LPF1.1@3460,2150
NetJ5_2: C8_LPF1.1 J5.2 J6.2 R10_LPF1.2 | length 105
  Top Layer w10: R10_LPF1.2@3410,1780 C8_LPF1.1@3410,1720 v1(3455,1720)
NetJ7_1: C4_LPF2.1 J7.1 R5_LPF2.2 | length 110
  Top Layer w10: v1(3460,1335) R5_LPF2.2@3460,1375 C4_LPF2.1@3460,1445
NetJ7_2: C8_LPF2.1 J7.2 R10_LPF2.2 | length 105
  Top Layer w10: R10_LPF2.2@3410,1075 C8_LPF2.1@3410,1015 v1(3455,1015)
NetJ8_1: C4_LPF3.1 J8.1 R5_LPF3.2 | length 110
  Top Layer w10: v1(3460,630) R5_LPF3.2@3460,670 C4_LPF3.1@3460,740
NetJ8_2: C8_LPF3.1 J8.2 R10_LPF3.2 | length 105
  Top Layer w10: R10_LPF3.2@3410,370 C8_LPF3.1@3410,310 v1(3455,310)
NetQ1_DSP1_B: Q1_DSP1.B R1_DSP1.1 U1_DSP1.17 | length 692.6
  Top Layer w6: U1_DSP1.17@1595.47,1437.68 v1(1595.47,1511.42)
  Top Layer w7: v1(1840,1185) Q1_DSP1.B@1920.55,1185
  Top Layer w15: Q1_DSP1.B@1920.57,1185.02 1921.95,1185.02 1975,1131.97 R1_DSP1.1@1975,1130
  Bottom Layer w6: v1(1595.47,1511.42) 1595.47,1374.53 1785,1185 v1(1840,1185)
NetQ1_DSP2_B: Q1_DSP2.B R1_DSP2.1 U1_DSP2.17 | length 692.6
  Top Layer w6: U1_DSP2.17@1620.32,407.2 v1(1620.32,480.94)
  Top Layer w7: v1(1864.84,154.53) Q1_DSP2.B@1945.39,154.53
  Top Layer w15: Q1_DSP2.B@1945.41,154.55 1946.79,154.55 1999.84,101.5 R1_DSP2.1@1999.84,99.53
  Bottom Layer w6: v1(1620.32,480.94) 1620.32,344.06 1809.84,154.53 v1(1864.84,154.53)
NetR4_DSP1_2: R4_DSP1.2 U1_DSP1.3 | length 77.8
  Top Layer w7: R4_DSP1.2@1380,1673.58 1380.16,1673.74 1457.52,1673.74 U1_DSP1.3@1457.68,1673.9
NetR4_DSP2_2: R4_DSP2.2 U1_DSP2.3 | length 77.8
  Top Layer w7: R4_DSP2.2@1404.84,643.11 1405,643.27 1482.36,643.27 U1_DSP2.3@1482.52,643.43
NetU1_DAC_6: U1_DAC.6 U1_DSP2.15 | length 133.5
  Top Layer w6: U1_DSP2.15@1580.94,407.2 v1(1580.94,480.94) ; v1(2450,997.2) U1_DAC.6@2509.76,997.2
NetU1_DAC_7: U1_DAC.7 U1_DSP2.19 | length 133.5
  Top Layer w6: U1_DSP2.19@1659.68,407.2 v1(1659.68,480.94) ; v1(2450,971.61) U1_DAC.7@2509.76,971.61
NetU1_DAC_8: U1_DAC.8 U1_DSP2.16 | length 112.1
  Top Layer w6: U1_DSP2.16@1600.63,407.2 v1(1600.63,459.53) ; v1(2450,946.02) U1_DAC.8@2509.76,946.02
NetU1_DAC_11: U1_DAC.11 U1_DSP2.14 | length 112.1
  Top Layer w6: U1_DSP2.14@1561.26,407.2 v1(1561.26,459.53) ; v1(2450,869.25) U1_DAC.11@2509.76,869.25
NetU1_DAC_12: U1_DAC.12 U1_DSP2.27 | length 133.5
  Top Layer w6: v1(1743.43,505.63) U1_DSP2.27@1817.17,505.63 ; v1(2450,843.66) U1_DAC.12@2509.76,843.66
NetU1_DAC_19: R6_LPF3.2 U1_DAC.19 | length 109.8
  Top Layer w6: U1_DAC.19@2730.24,894.84 v1(2790,894.84)
  Top Layer w10: R6_LPF3.2@3140,310 v1(3140,360)
NetU1_DAC_20: R1_LPF3.2 U1_DAC.20 | length 104.8
  Top Layer w6: U1_DAC.20@2730.24,920.43 v1(2790,920.43)
  Top Layer w10: v1(3145,740) R1_LPF3.2@3190,740
NetU1_DAC_21: R6_LPF2.2 U1_DAC.21 | length 109.8
  Top Layer w6: U1_DAC.21@2730.24,946.02 v1(2790,946.02)
  Top Layer w10: R6_LPF2.2@3140,1015 v1(3140,1065)
NetU1_DAC_22: R1_LPF2.2 U1_DAC.22 | length 104.8
  Top Layer w6: U1_DAC.22@2730.24,971.61 v1(2790,971.61)
  Top Layer w10: v1(3145,1445) R1_LPF2.2@3190,1445
NetU1_DAC_26: R6_LPF1.2 U1_DAC.26 | length 109.8
  Top Layer w6: U1_DAC.26@2730.24,1073.98 v1(2790,1073.98)
  Top Layer w10: R6_LPF1.2@3140,1720 v1(3140,1770)
NetU1_DAC_27: R1_LPF1.2 U1_DAC.27 | length 104.8
  Top Layer w6: U1_DAC.27@2730.24,1099.57 v1(2790,1099.57)
  Top Layer w10: v1(3145,2150) R1_LPF1.2@3190,2150
NetU1_DSP1_8: U1_ADC1.16 U1_ADC2.16 U1_ADC3.16 U1_DSP1.8 U1_DSP1.16 U1_DSP2.8 | length 360
  Top Layer w6: v1(935,187.2) U1_ADC3.16@989.17,187.2 ; v1(935,697.2) U1_ADC2.16@989.17,697.2 ; v1(935,1212.2) U1_ADC1.16@989.17,1212.2 ; v1(1385,1575.47) U1_DSP1.8@1457.68,1575.47 ; v1(1410,545) U1_DSP2.8@1482.52,545 ; U1_DSP1.16@1575.79,1437.68 v1(1575.79,1490)
NetU1_DSP1_9: U1_ADC1.17 U1_ADC2.17 U1_ADC3.17 U1_DSP1.9 U1_DSP1.19 U1_DSP2.9 | length 401.5
  Top Layer w6: v1(915,206.89) U1_ADC3.17@989.17,206.89 ; v1(915,716.89) U1_ADC2.17@989.17,716.89 ; v1(915,1231.89) U1_ADC1.17@989.17,1231.89 ; v1(1405,1555.79) U1_DSP1.9@1457.68,1555.79 ; v1(1430,525.32) U1_DSP2.9@1482.52,525.32 ; U1_DSP1.19@1634.84,1437.68 v1(1634.84,1511.42)
NetU1_DSP1_10: U1_ADC2.18 U1_DSP1.10 | length 126.9
  Top Layer w6: v1(935,736.57) U1_ADC2.18@989.17,736.57 ; v1(1385,1536.1) U1_DSP1.10@1457.68,1536.1
NetU1_DSP1_11: U1_ADC1.18 U1_DSP1.11 | length 106.9
  Top Layer w6: v1(935,1251.57) U1_ADC1.18@989.17,1251.57 ; v1(1405,1516.42) U1_DSP1.11@1457.68,1516.42
NetU1_DSP1_14: U1_DSP1.14 U1_DSP2.10 | length 124.8
  Top Layer w6: v1(1410,505.63) U1_DSP2.10@1482.52,505.63 ; U1_DSP1.14@1536.42,1437.68 v1(1536.42,1490)
NetU1_DSP1_15: U1_DSP1.15 U1_DSP2.11 | length 126.3
  Top Layer w6: v1(1430,485.94) U1_DSP2.11@1482.52,485.94 ; U1_DSP1.15@1556.1,1437.68 v1(1556.1,1511.42)
NetU1_DSP1_27: U1_DSP1.27 U1_DSP2.29 | length 147.5
  Top Layer w6: v1(1718.58,1536.1) U1_DSP1.27@1792.32,1536.1 ; v1(1743.43,545) U1_DSP2.29@1817.17,545
NetU1_DSP1_29: U1_ADC3.18 U1_DSP1.29 | length 127.9
  Top Layer w6: v1(935,226.57) U1_ADC3.18@989.17,226.57 ; v1(1718.58,1575.47) U1_DSP1.29@1792.32,1575.47
NetU1_PLL_10: U1_PLL.10 U2_PLL.3 | length 167.7
  Top Layer w14: U1_PLL.10@1012.48,1968.5 1055,1968.5 1098.5,1925 U2_PLL.3@1098.5,1861.34
NetU2_DAC_6: U2_DAC.6 U2_DAC.7 | length 50
  Top Layer w10: U2_DAC.6@2725,1318.82 U2_DAC.7@2725,1368.82
nRST: C9_MCU.2 J11_CTRL.1 U1_MCU.7 | length 125
  Top Layer w6: v1(1100,2945.47) U1_MCU.7@1151.38,2945.47 C9_MCU.2@1225,2945.47
nRST_DSP: U1_DSP1.5 U1_DSP2.5 U1_MCU.33 | length 156.6
  Top Layer w6: U1_MCU.33@698.62,3122.64 v1(750,3122.64) ; v1(1405,1634.53) U1_DSP1.5@1457.68,1634.53 ; v1(1430,604.06) U1_DSP2.5@1482.52,604.06
PLL_MODE0: U1_DSP1.38 U1_DSP2.38 U1_MCU.34 | length 218.9
  Top Layer w6: U1_MCU.34@698.62,3102.95 v1(770,3102.95) ; v1(1713.58,1698.58) U1_DSP1.38@1713.58,1772.32 ; v1(1738.43,668.11) U1_DSP2.38@1738.43,741.85
PLL_MODE1: U1_DSP1.39 U1_DSP2.39 U1_MCU.35 | length 156
  Top Layer w6: U1_MCU.35@698.62,3083.27 v1(750,3083.27) ; v1(1693.9,1720) U1_DSP1.39@1693.9,1772.32 ; v1(1718.74,689.53) U1_DSP2.39@1718.74,741.85
SCK: TP2_PLL.1 U1_PLL.3 U3_PLL.1 | length 494.3
  Top Layer w10: TP2_PLL.1@660,2310 660,2255 636.77,2231.77 U3_PLL.1@636.77,2189.17 636.77,2123.23 685,2075 787.5,2075 837.5,2025 U1_PLL.3@837.5,1968.5
SCKO0: U1_ADC1.15 U3_PLL.3 | length 123.3
  Top Layer w6: U1_ADC1.15@760.83,1212.2 v1(815,1212.2)
  Top Layer w10: v1(585.59,2120) U3_PLL.3@585.59,2189.17
SCKO1: U1_ADC2.15 U3_PLL.14 | length 123.3
  Top Layer w6: U1_ADC2.15@760.83,697.2 v1(815,697.2)
  Top Layer w10: U3_PLL.14@636.77,1960.83 v1(636.77,2030)
SCKO2: U1_ADC3.15 U3_PLL.11 | length 108.3
  Top Layer w6: U1_ADC3.15@760.83,187.2 v1(815,187.2)
  Top Layer w10: U3_PLL.11@560,1960.83 v1(560,2015)
SCKO3: U1_DSP1.32 U3_PLL.13 | length 106.5
  Top Layer w6: v1(1740,1634.53) U1_DSP1.32@1792.32,1634.53
  Top Layer w10: U3_PLL.13@611.18,1960.83 v1(611.18,2015)
SCKO4: U1_DSP2.32 U3_PLL.6 | length 106.5
  Top Layer w6: v1(1764.84,604.06) U1_DSP2.32@1817.17,604.06
  Top Layer w10: v1(508.82,2135) U3_PLL.6@508.82,2189.17
SCKO5: U1_DAC.5 U3_PLL.9 | length 113.9
  Top Layer w6: v1(2450,1022.8) U1_DAC.5@2509.76,1022.8
  Top Layer w10: U3_PLL.9@508.82,1960.83 v1(508.82,2015)
SR: U1_MCU.44 U1_PLL.7 | length 127.9
  Top Layer w6: U1_MCU.44@698.62,2906.1 v1(770,2906.1)
  Top Layer w10: U1_PLL.7@937.5,1968.5 v1(937.5,2025)
SWCLK: J11_CTRL.4 U1_MCU.49 | length 51.4
  Top Layer w6: U1_MCU.49@777.36,2748.62 v1(777.36,2800)
SWDIO: J11_CTRL.2 U1_MCU.46 | length 71.4
  Top Layer w6: U1_MCU.46@698.62,2866.73 v1(770,2866.73)
VCOM: C6_DAC.2 U1_DAC.25 U2_DAC.3 | length 676.8
  Top Layer w10: U2_DAC.3@2515,1318.82 2570,1318.82 2695,1193.82 2763.5,1193.82 2905,1052.32 2901.06,1048.39 U1_DAC.25@2730.24,1048.39
VCOM_LPF1: U1_LPF1.3 U1_LPF1.5 U1_LPF2.3 U1_LPF2.5 U1_LPF3.3 U1_LPF3.5 U2_DAC.1 U2_DAC.2 | length 742.1
  Top Layer w15: U2_DAC.2@2515,1368.82 U2_DAC.1@2515,1418.82 ; U1_LPF3.5@3200,420 3200,500 3250,550 U1_LPF3.3@3250,630 ; U1_LPF2.5@3200,1125 3200,1205 3250,1255 U1_LPF2.3@3250,1335 ; U1_LPF1.5@3200,1830 3200,1910 3250,1960 U1_LPF1.3@3250,2040
  other v1: 3225,525 3225,1230 3225,1935
pads on no net: MH1.1 MH2.1 MH3.1 MH4.1 U1_ADC1.1 U1_ADC1.2 U1_ADC1.5 U1_ADC1.9 U1_ADC1.10 U1_ADC1.19 U1_ADC1.20 U1_ADC1.21 U1_ADC1.22 U1_ADC1.27 U1_ADC1.28 U1_ADC1.29 U1_ADC1.30 U1_ADC2.1 U1_ADC2.2 U1_ADC2.5 U1_ADC2.9 U1_ADC2.10 U1_ADC2.19 U1_ADC2.20 U1_ADC2.21 U1_ADC2.22 U1_ADC2.27 U1_ADC2.28 U1_ADC2.29 U1_ADC2.30 U1_ADC3.1 U1_ADC3.2 U1_ADC3.5 U1_ADC3.9 U1_ADC3.10 U1_ADC3.19 U1_ADC3.20 U1_ADC3.21 U1_ADC3.22 U1_ADC3.27 U1_ADC3.28 U1_ADC3.29 U1_ADC3.30 U1_DAC.1 U1_DAC.13 U1_DAC.15 U1_DAC.16 U1_DAC.28 U1_DSP1.2 U1_DSP1.4 U1_DSP1.21 U1_DSP1.26 U1_DSP1.31 U1_DSP1.43 U1_DSP1.44 U1_DSP1.45 U1_DSP1.46 U1_DSP2.2 U1_DSP2.4 U1_DSP2.21 U1_DSP2.26 U1_DSP2.31 U1_DSP2.43 U1_DSP2.44 U1_DSP2.45 U1_DSP2.46 U1_MCU.1 U1_MCU.2 U1_MCU.3 U1_MCU.4 U1_MCU.6 U1_MCU.25 U1_MCU.28 U1_MCU.37 U1_MCU.38 U1_MCU.39 U1_MCU.50 U1_MCU.51 U1_MCU.52 U1_MCU.53 U1_MCU.54 U1_MCU.56 U1_MCU.57 U1_MCU.60 U1_MCU.61 U1_MCU.62 U1_PLL.2 U1_PLL.11 U1_PLL.15 U1_PLL.18 U1_PLL.19
copper on no net:
  other v1: 1849.84,722.8 2570,1368.82

## Keep-outs
Keep-Out Layer:
  the board outline again, w30

## Silkscreen, mask and mechanical layers (free items; w line width, h text height)
Top Overlay:
  lines w50: 1750,2500 1750,3300 1925,3300 ; 2375,3300 2550,3300 2550,2500 ; 2650,2500 2650,3300 2825,3300 ; 3275,3300 3450,3300 3450,2500
  text "nRST" at 162.47,2980.8 h60
  text "SWDIO" at 117.95,2880.8 h60
  text "GND" at 181.45,2780.8 h60
  text "GND" at 2828.22,2695.8 h60
  text "+5V0" at 2989.31,2696.05 h60
  text "GND" at 1933.22,2690.8 h60
  text "+3V3" at 2089.26,2691.05 h60
  text "SWCLK" at 106.69,2680.8 h60
  text "SCK" at 606.11,2385.8 h60
  text "GND" at 1033.22,2385.8 h60
  text "MCK" at 1107.42,2150.8 h60
Board Outline:
  the board outline again, w1